# Altium PCB 013_BP.PcbDoc
Units mil, origin at the board's own origin, x right, y up, seen from the top; angles counter-clockwise.
Board outline 1065 x 625 mil, 2 copper layers (Top Layer, Bottom Layer); 5 components, 5 nets, 20 pads, 0 vias.
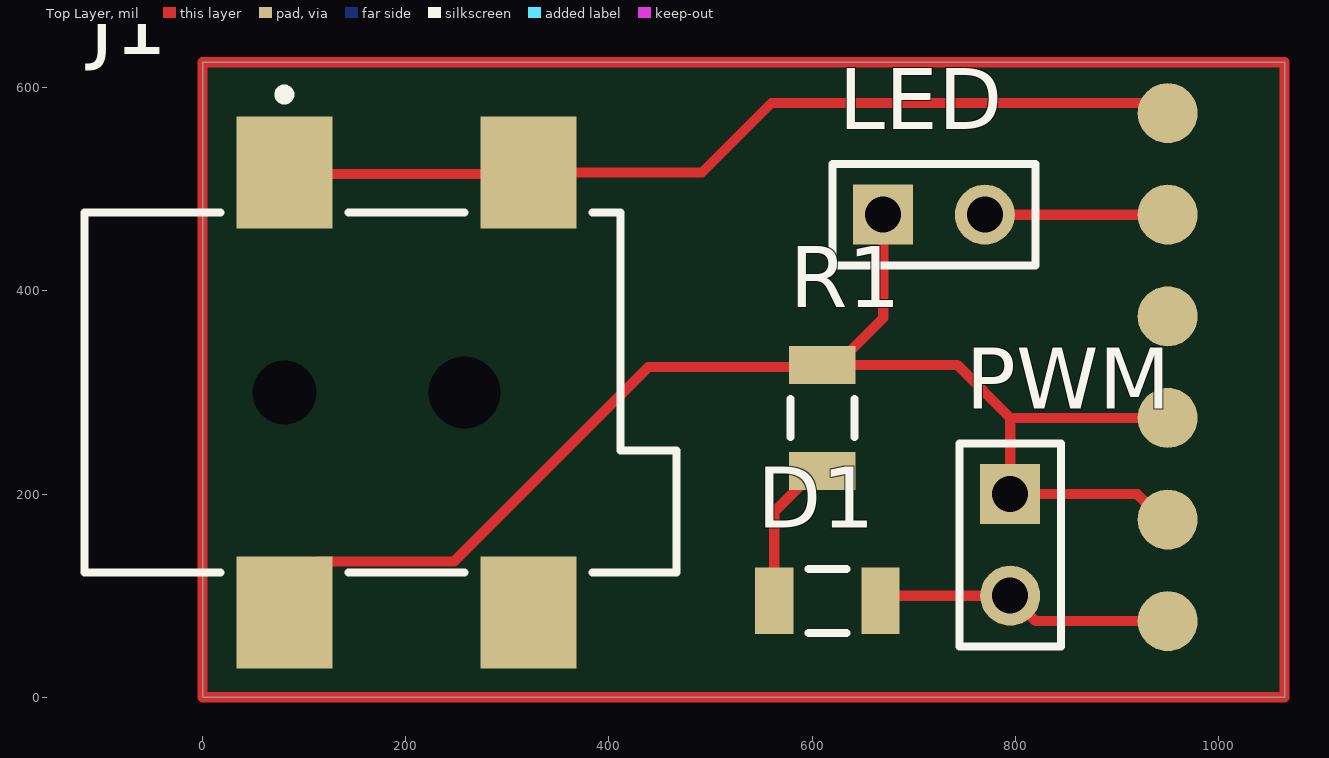
[diagram p0: Top Layer view]
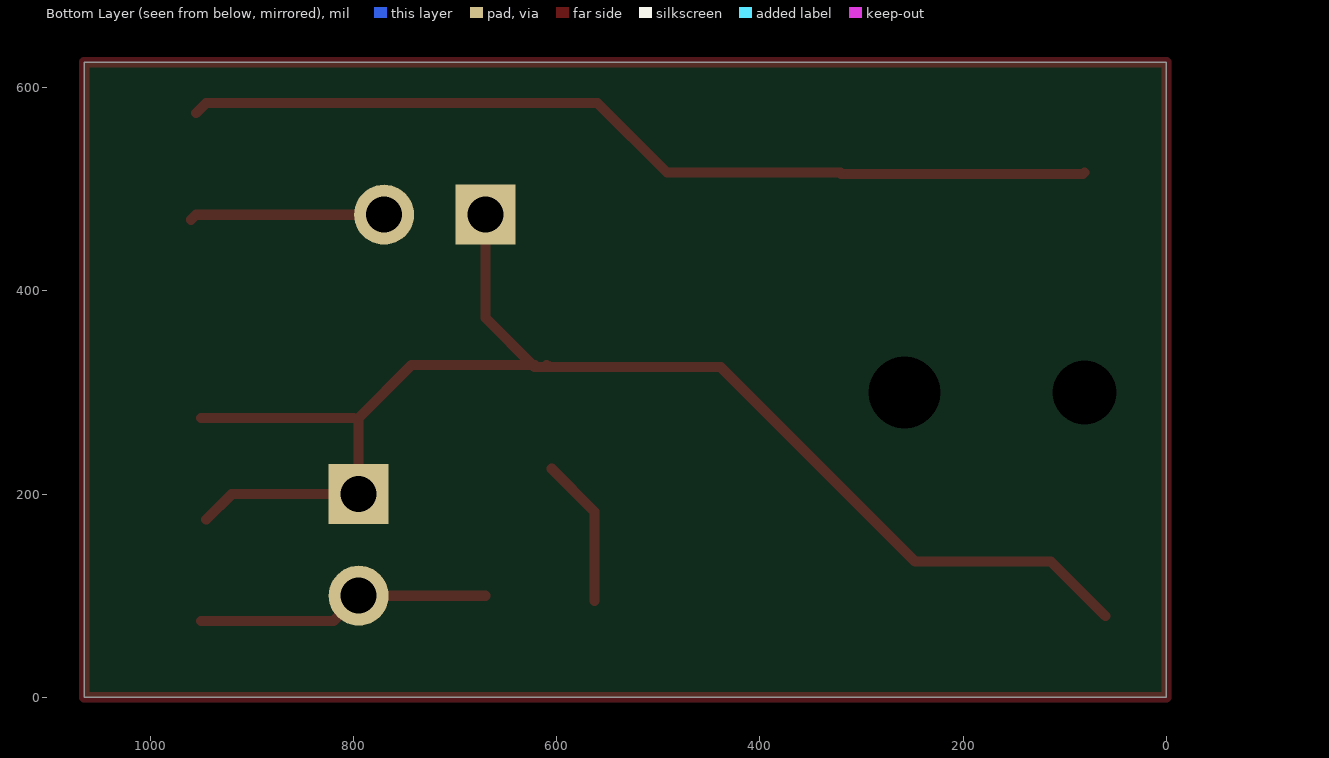
[diagram p1: Bottom Layer view, seen from below]
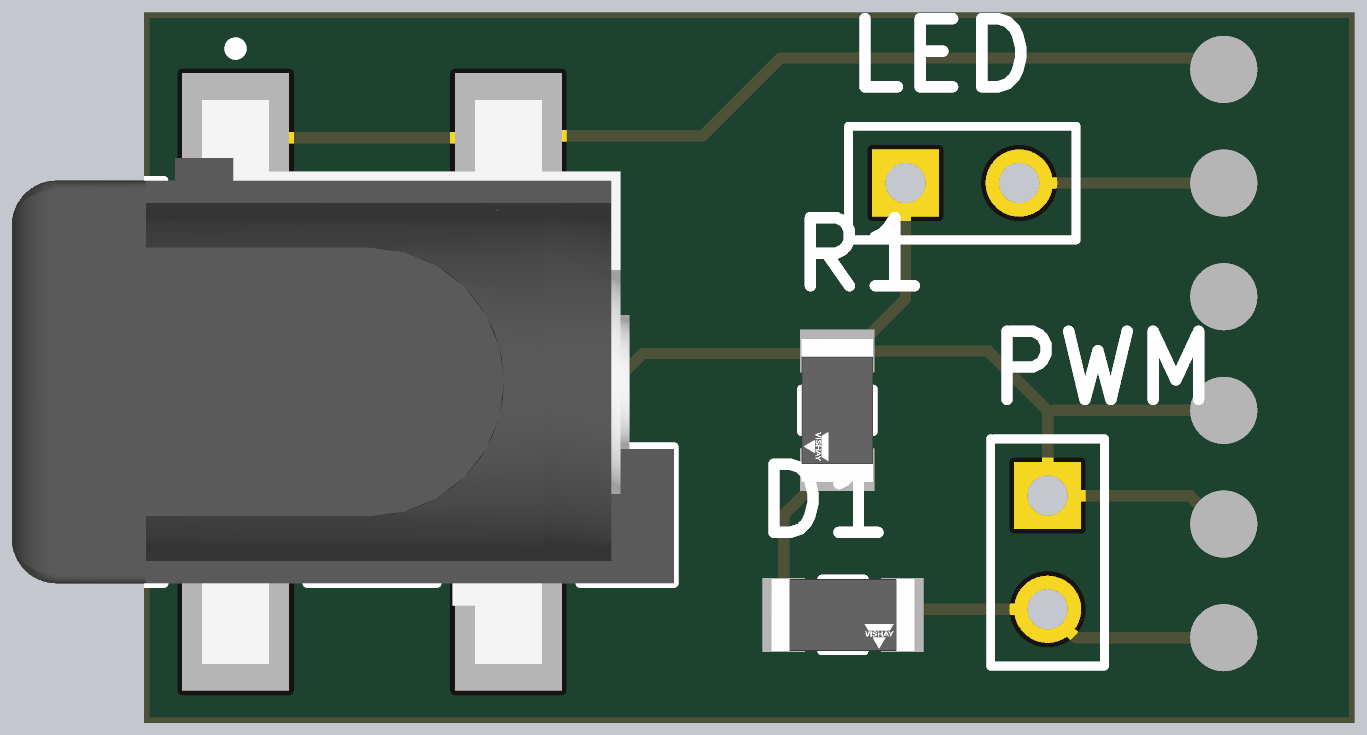
[diagram p2: 3D render of the assembled board from above, using the file's embedded part models]

## Layer stack, top to bottom
Top Solder: solder mask 0.4, Solder Resist, Dk 3.5
Top Layer: signal copper 1.4
Dielectric 1: dielectric 12.6, FR-4, Dk 4.8
Bottom Layer: signal copper 1.4
Bottom Solder: solder mask 0.4, Solder Resist, Dk 3.5

## Board outline
0,0 0,625 1065,625 1065,0

## Design rules (kind name [scope] priority, off if disabled: settings)
Clearance [All] p1: gap=10 ignorepadtopadclearanceinfootprint=FALSE except(0: Arc-Hole Track-Hole SMDPad-Hole THPad-Hole Via-Hole Fill-Hole Poly-Hole Region-Hole Text-Hole)
PolygonConnect [All] p1: connectstyle=Relief reliefconductorwidth=10 reliefentries=4 polygonreliefangle="90 Angle" airgapwidth=10
RoomDefinition 013_BP [InComponentClass('013_BP')] p1: confinementstyle=ConfineIn formatcopy=TRUE lockcomponents=FALSE outline -165,-20 1065,-20 1065,965 -165,965
RoutingVias [All] p1: holewidth=28 width=50 viastyle="Through Hole" minholewidth=28 minwidth=50 maxholewidth=28 maxwidth=50
SolderMaskExpansion [All] p1: expansion=4 istentingtop=FALSE
Width [All] p1: maxlimit=10 minlimit=10 preferedwidth=10
30 further rules are at their usual default settings.

## Components (designator, comment, footprint, x,y, rotation, side; value= is the part's Value field where it differs from the comment)
D1 "Vf1.45V20mA" FP-CRCW1206-e3-IPC_C 615,95 r0 top
J1 "PJ-002AH-SMT-TR" CUI-PJ-002AH-4_V 175,300 r0 top
LED "Header 2" HDR1X2 670,475 r0 top
PWM "Header 2" HDR1X2 795,200 r270 top
R1 "CRCW1206180RFKEA" FP-CRCW1206-e3-IPC_C 610,275 r270 top

## Footprints (in the part's own frame and the unit in brackets; to place one, negate y for a bottom-side part, rotate by r counter-clockwise, add the part's x,y. Pads: shape width x height; smd on the part's side, far side on the other; paste and mask are expansions set on the pad)
CUI-PJ-002AH-4_V [mm] "SMD, 4-Leads, Body 14.8x9 mm, Pitch 6.1mm"
  rect 2.4x2.8 smd: 1(-2.4,5.5) 1(3.7,5.5) 2(-2.4,-5.5) 3(3.7,-5.5)
  round 0 hole 1.6: MH1(-2.4,0)
  round 0 hole 1.8: MH2(2.1,0)
  silkscreen extent -7.4,-4.5 7.4,7.57, body extent -7.4,-6.3 7.4,6.3, height 11.2
FP-CRCW1206-e3-IPC_C [mil]
  rect 37.64x65.28 smd paste+0 mask+0: 1(-52.21,0) 2(52.21,0)
  silkscreen extent -19,-31 19,31, body extent -75,-38 75,38, height 10
HDR1X2 [mm] "Connector; Header; 2 Position"
  rect 1.5x1.5 hole 0.9: 1(0,0)
  round 1.5 hole 0.9: 2(2.54,0)
  silkscreen extent -1.27,-1.27 3.81,1.27

## Part data
D1 R1: library part CMP-2003-01848-2, "RES Thick Film, 180Ω, 1%, 0.25W, 100ppm/°C, 1206", Case Code (Imperial)=1206, Case Code (Metric)=3216, Max Operating Temperature=155°C, Min Operating Temperature=-55°C, Package Quantity=5000, Power Rating=250mW, Resistance=180R, Temperature Coefficient=100ppm/°C, Tolerance=1%, Voltage Rating=200V, Case/Package=1206, Composition="Thick Film", Contact Plating=Tin, Depth=1.6mm, Height=0.55mm, Lead Free="Lead Free", Length=3.2mm, Military Standard=Not, Mount="Surface Mount", Number of Pins=2, Packaging="Tape and Reel", Radiation Hardening=No, Termination=SMD/SMT, Voltage Rating (DC)=200V, Weight=0.000353oz, Width=1.6mm
J1: library part CMP-2000-06896-2, "DC Power Jack, Right Angle, -25 to 85 degC, 4-Pin 14.8 x 9 x 11 mm SMD, RoHS, Tape and Reel", Current Rating=5A, Flammability Rating=UL94V-0, Insulation Resistance=100MOhms, Manufacturer=CUIInc., Operating Temperature Range=-25Cto+85C, Package Description="4-Pin Surface Mount Device, Body 14.8 x 9 mm, Pitch 6.1 mm", Package Reference=PJ-002AH, Voltage Rating=24V, Brand=CUI, Connector Type=DCPowerJack, Contact Gender=Male, Contact Material=Brass, Contact Plating=Nickel, Datasheet URL=http://www.cui.com/product/resource/pj-002ah-smt.pdf, Datasheet Version="Rev. 1.03, 11/2012", Factory Pack Quantity=350, Housing Material=Polyamide(PA), Inside Contact Diameter=2mm, Manufacturer URL=http://www.cui.com/, Mounting Angle=Right, Mounting Style=SMD/SMT, Mounting Technology=SurfaceMount, Outside Contact Diameter=6.5mm, Packaging=Reel, PartNumber=PJ-002AH, Product=Jacks, Product Category=DCPowerConnectors, RoHS=True, Termination Style=SMD/SMT
LED PWM: "Header, 2-Pin", LatestRevisionDate=17-Jul-2002, LatestRevisionNote="Re-released for DXP Platform.", Publisher="Altium Limited"

## Free pads (board coordinates)
  round 59.06 smd paste+0 mask+0: 4(950,75) 4(950,175) 4(950,275) 4(950,375) 4(950,475) 4(950,575)

## Nets (pads, with @x,y where several pads share a name; then routed paths per layer and width w, separated by ;. In a path a pad name is that pad's centre, name@x,y a point inside that pad or via, vN(x,y) a via of type N, cw(c..) or ccw(c..) an arc to the next point about the centre after c; other vN are vias at no path point)
+12: J1.1 pad.4@950,575 | length 907
  Top Layer w10: J1.1@80.51,516.54 82.05,515 J1.1@320,515 ; J1.1@320.67,516.54 491.54,516.54 560,585 945,585 pad.4@955,575
CTRL: D1.2 pad.4@950,75 PWM.2 | length 290.4
  Top Layer w10: D1.2@670,100 PWM.2 820,75 pad.4@950,75
LED+: LED.2 pad.4@950,475 | length 192.1
  Top Layer w10: LED.2 950,475 955,475 pad.4@960,470
LED-: J1.2 LED.1 pad.4@950,175 pad.4@950,275 PWM.1 R1.1 | length 1414.4
  Top Layer w10: J1.2@60,80 113.58,133.58 247.21,133.58 438.63,325 607.79,325 R1.1 ; R1.1@610,325 621.61,325 670,373.39 LED.1 ; R1.1@621.61,327.21 742.79,327.21 795,275 PWM.1 920,200 pad.4@945,175 ; 800,275 pad.4@950,275
NetD1_1: D1.1 R1.2 | length 147.5
  Top Layer w10: D1.1 562.79,182.79 R1.2@605,225
pads on no net: J1.3 J1.MH1 J1.MH2
copper on no net: | length 3380
  Top Layer w10: 0,0 1065,0 1065,625 0,625 0,0